# Altium PCB 加密狗第五版.PcbDoc
Units mm, origin at the board's own origin, x right, y up, seen from the top; angles counter-clockwise.
Board outline 16.51 x 19.43 mm, 2 copper layers (Top Layer, Bottom Layer); 20 components, 24 nets, 83 pads, 18 vias.
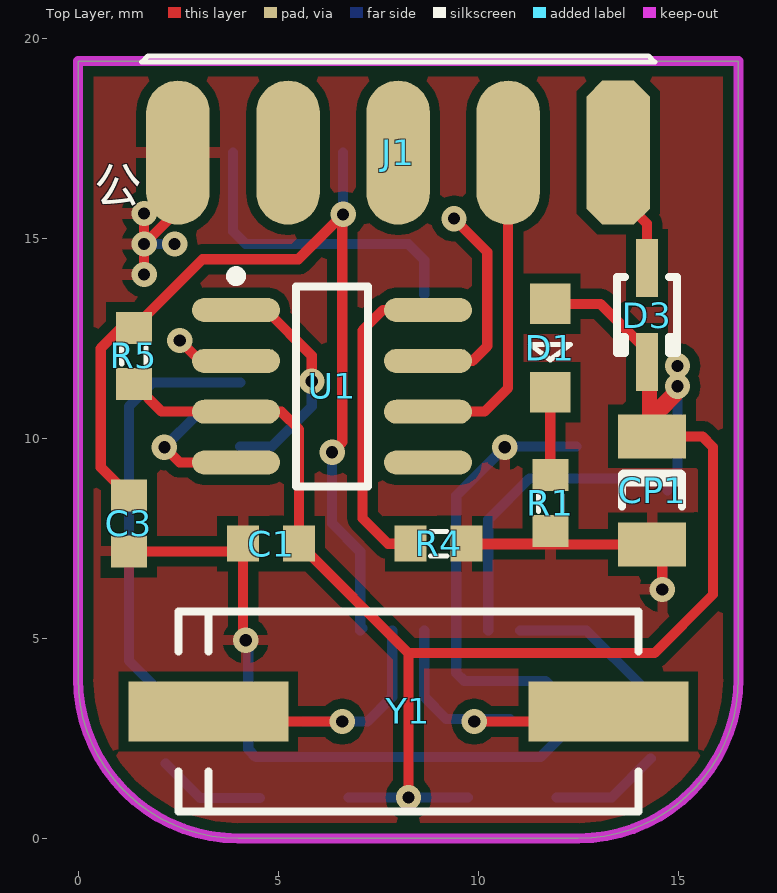
[diagram p0: Top Layer view]
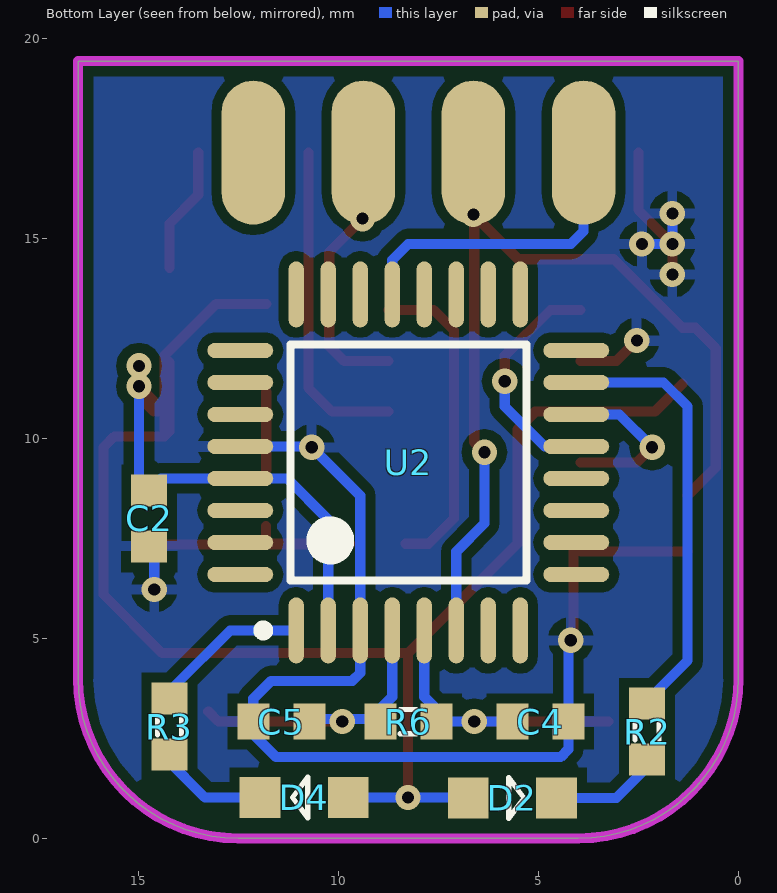
[diagram p1: Bottom Layer view, seen from below]

## Layer stack, top to bottom
Top Layer: signal copper 0.0356
Dielectric: dielectric 0.32, FR-4, Dk 4.8
Bottom Layer: signal copper 0.0356

## Board outline
0,4 ccw(c4,4) 4,0 12.51,0 ccw(c12.51,4) 16.51,4 16.51,19.431 0,19.431

## Design rules (kind name [scope] priority, off if disabled: settings)
Clearance [All] p1: gap=0.254
PolygonConnect [All] p1: connectstyle=Relief reliefconductorwidth=0.254 reliefentries=4 polygonreliefangle="90 Angle"
RoutingVias [All] p1: holewidth=0.305 width=0.635 viastyle="Through Hole" minholewidth=0.305 minwidth=0.635 maxholewidth=0.305 maxwidth=0.635
SilkscreenOverComponentPads [All] p1: minsilkscreentomaskgap=0.254
SolderMaskExpansion [All] p1: expansion=0.102
Width [All] p1: maxlimit=0.254 minlimit=0.254 preferedwidth=0.254
27 further rules are at their usual default settings.

## Components (designator, comment, footprint, x,y, rotation, side; value= is the part's Value field where it differs from the comment)
C1 "0.1uF" 1608[0603] 4.826,7.366 r180 top
C2 "0.1uF" 1608[0603] 14.732,8.001 r270 bottom
C3 "0.1uF" 1608[0603] 1.27,7.874 r270 top
C4 "22pF" 1608[0603] 4.953,2.921 r180 bottom
C5 "22pF" 1608[0603] 11.43,2.921 r0 bottom
CP1 "10uF/10V" C1206 14.351,8.701 r270 top
D1 "Green" LED 11.811,13.335 r270 top
D2 "Red" LED 6.731,1.016 r180 bottom
D3 "BAT760" SOD323 14.224,13.081 r270 top
D4 "黄" LED 9.779,1.016 r0 bottom
J1 "DB9" DB9Male 8.001,17.145 r0 top
R1 "Res2" "1608[0603] -R" 11.811,8.382 r90 top
R2 "Res2" "1608[0603] -R" 2.286,2.667 r270 bottom
R3 "Res2" "1608[0603] -R" 14.224,2.794 r270 bottom
R4 "Res2" "1608[0603] -R" 9.017,7.366 r180 top
R5 "Res2" "1608[0603] -R" 1.397,12.065 r270 top
R6 "Res2" "1608[0603] -R" 8.255,2.921 r180 bottom
U1 "MCP2551-E/SN" SOIC-SN8_N 6.35,11.303 r0 top
U2 "MC9S08DZ16" LQFP-32_N 8.255,9.398 r90 bottom
Y1 "XTAL" BCY-F2/Z13 8.255,3.175 r0 top

## Footprints (in the part's own frame and the unit in brackets; to place one, negate y for a bottom-side part, rotate by r counter-clockwise, add the part's x,y. Pads: shape width x height; smd on the part's side, far side on the other; paste and mask are expansions set on the pad)
1608[0603] [mm]
  rect 0.8x0.9 smd: 1(-0.7,0) 2(0.7,0)
  body extent -0.87,-0.48 0.87,0.48, height 1.3
"1608[0603] -R" [mm]
  rect 0.8x0.9 smd: 1(-0.7,0) 2(0.7,0)
  silkscreen extent -0.2,-0.3 0.2,0.3, body extent -0.87,-0.48 0.87,0.48, height 1.3
BCY-F2/Z13 [mm] "Quartz Crystal,"
  rect 4x1.5 smd: 1(-5,0) 2(5,0)
  silkscreen extent -5.75,-2.5 5.75,2.5
C1206 [mm]
  rect 1.1x1.7 smd: 1(-1.35,0) 2(1.35,0)
  silkscreen extent -0.4,-0.75 0.4,0.75, body extent -1.7,-0.9 1.7,0.9, height 1.3
DB9Male [mil]
  oct 62.5x141.67 smd: 1(216.67,0)
  oval 62.5x141.67 smd: 2(108.33,0) 3(0,0) 4(-108.33,0) 5(-216.67,0)
  oval 62.5x141.67 smd far side: 6(162.5,0) 7(54.17,0) 8(-54.17,0) 9(-162.5,0)
  silkscreen extent -252,89 253,95
LED [mil]
  rect 40x40 smd: 1(-1.06,-0.22) 2(85.95,-0.22)
  silkscreen extent 39,-20 54,20
LQFP-32_N [mm] "Thi"
  oval 1.65x0.381 smd: 1(-4.2,2.8) 2(-4.2,2) 3(-4.2,1.2) 4(-4.2,0.4) 5(-4.2,-0.4) 6(-4.2,-1.2) 7(-4.2,-2) 8(-4.2,-2.8) 17(4.2,-2.8) 18(4.2,-2) 19(4.2,-1.2) 20(4.2,-0.4) 21(4.2,0.4) 22(4.2,1.2) 23(4.2,2) 24(4.2,2.8)
  oval 0.381x1.65 smd: 9(-2.8,-4.2) 10(-2,-4.2) 11(-1.2,-4.2) 12(-0.4,-4.2) 13(0.4,-4.2) 14(1.2,-4.2) 15(2,-4.2) 16(2.8,-4.2) 25(2.8,4.2) 26(2,4.2) 27(1.2,4.2) 28(0.4,4.2) 29(-0.4,4.2) 30(-1.2,4.2) 31(-2,4.2) 32(-2.8,4.2)
  silkscreen extent -4.32,-2.95 2.95,3.75, body extent -3.5,-3.5 3.5,3.5, height 1.6
SOD323 [mm] "SOD-323/SC-76; 2 Leads; Body 1.7 x 1.3 mm,"
  rect 1.45x0.55 smd: 1(1.175,0) 2(-1.175,0)
  silkscreen extent -0.95,-0.75 0.95,0.75
SOIC-SN8_N [mm]
  oval 2.2x0.6 smd: 1(-2.4,1.905) 2(-2.4,0.635) 3(-2.4,-0.635) 4(-2.4,-1.905) 5(2.4,-1.905) 6(2.4,-0.635) 7(2.4,0.635) 8(2.4,1.905)
  silkscreen extent -2.52,-2.5 0.9,2.88, body extent -2,-2.5 2,2.5, height 1.75

## Part data
C1 C2 C3 C4 C5: library part CAP, "C"
CP1: library part CAPACITOR, "C"
D1 D2 D4: library part LED2, "Typical RED, GREEN, YELLOW, AMBER"
D3: "Schottky Barrier Diode"
U1: "High-Speed CAN Transceiver, 8-Pin SOIC, Extended Tem"
U2: library part MC9S08DZ60
Y1: "Crystal Oscillator"

## Via types
v1: diameter 0.635, hole 0.305, Top Layer to Bottom Layer, tented both sides, 18 vias

## Nets (pads, with @x,y where several pads share a name; then routed paths per layer and width w, separated by ;. In a path a pad name is that pad's centre, name@x,y a point inside that pad or via, vN(x,y) a via of type N, cw(c..) or ccw(c..) an arc to the next point about the centre after c; other vN are vias at no path point)
BKGD: J1.9 U2.21 | length 7.9
  Bottom Layer w0.254: J1.9 3.873,15.176 4.191,14.859 8.255,14.859 8.655,14.459 U2.21
CANH: J1.7 U1.7 | length 5.2
  Top Layer w0.254: U1.7 9.864,11.938 10.231,12.305 10.231,14.661 v1(9.398,15.494)
CANL: J1.2 U1.6 | length 8.1
  Top Layer w0.254: U1.6 10.16,10.668 10.753,11.261 J1.2
EXTAL: C5.1 R6.1 U2.4 Y1.2 | length 7.5
  Top Layer w0.254: v1(9.906,2.921) 13.001,2.921 Y1.2
  Bottom Layer w0.254: U2.4 8.655,3.537 9.206,2.986 C5.1@10.795,2.986
GND: C1.2 C2.2 C3.2 C4.2 C5.2 CP1.2 J1.5 R1.1 R4.1 U1.2 U2.3 U2.28 | length 44.9
  Top Layer w0.254: C3.2 3.934,7.174 C1.2 4.126,5.018 v1(4.191,4.953) ; v1(1.651,14.097) v1(1.651,14.859) ; v1(1.651,15.621) v1(1.651,14.859) ; J1.5 2.498,15.706 v1(1.651,14.859) ; v1(2.54,12.446) 3.048,11.938 U1.2 ; R1.1@11.811,7.809 R1.1 11.811,7.366 R4.1 9.732,7.351 CP1.2 14.605,7.097 v1(14.605,6.223)
  Bottom Layer w0.254: v1(1.651,14.097) v1@1.778,14.224 ; v1(1.651,15.621) v1(1.651,14.859) v1(2.413,14.859) ; v1(4.191,4.953) 4.253,4.891 C4.2 4.253,2.224 4.445,2.032 11.557,2.032 12.13,2.605 C5.2 12.13,3.491 11.684,3.937 9.652,3.937 9.455,4.134 U2.3 9.455,8.566 v1(10.668,9.779) 10.687,9.798 U2.28 ; v1(14.605,6.223) C2.2@14.605,7.174
IRQ: R3.1 U2.1 | length 4.1
  Bottom Layer w0.254: U2.1 12.709,5.198 14.097,3.81 R3.1@14.097,3.367
NetD1_2: D1.2 R1.2 | length 2
  Top Layer w0.254: R1.2@11.811,9.209 11.806,9.215 D1.2 D1.2@11.811,11.146
NetD2_2: D2.2 R2.2 | length 2.7
  Bottom Layer w0.254: R2.2@2.192,1.872 3.053,1.011 D2.2
NetD4_2: D4.2 R3.2 | length 2.8
  Bottom Layer w0.254: D4.2 13.34,1.021 R3.2@14.318,1.999
NetR4_2: R4.2 U1.8 | length 8
  Top Layer w0.254: R4.2 7.747,7.366 7.112,8.001 7.112,12.7 7.62,13.208 U1.8
PTD0: R2.1 U2.15 | length 10.9
  Bottom Layer w0.254: R2.1@2.317,3.398 1.27,4.445 1.27,10.795 1.873,11.398 U2.15
PTD2: U2.17
RESET: C3.1 J1.8 R5.1 U2.6 | length 23.8
  Top Layer w0.254: C3.1 0.566,9.278 0.566,12.25 1.081,12.765 R5.1 3.11,14.478 5.503,14.478 v1@6.604,15.579 ; v1(6.35,9.652) 6.604,9.906 v1@6.604,15.579 ; v1(6.625,15.6) v1@6.604,15.579
  Bottom Layer w0.254: v1(6.35,9.652) 6.35,7.874 7.055,7.169 U2.6 U2.6@7.112,5.255 ; v1(6.625,15.6) J1.8
RXCAN: U1.4 U2.14 | length 4.2
  Top Layer w0.254: v1(2.159,9.779) 2.54,9.398 U1.4
  Bottom Layer w0.254: v1(2.159,9.779) 2.978,10.598 U2.14
RXD0: U2.8
S\S\: U2.9
SCL/MOSI: U2.11
SDA/MISO: U2.12
SPSCK: U2.10
TXCAN: U1.1 U2.13 | length 5.9
  Top Layer w0.254: U1.1 4.699,13.208 5.842,12.065 v1(5.842,11.43)
  Bottom Layer w0.254: U2.13@4.074,9.779 U2.13 4.845,9.798 5.842,10.795 v1(5.842,11.43)
TXD0: U2.7
VCC: D3.2 J1.1 | length 3.2
  Top Layer w0.254: J1.1 13.504,16.087 14.224,15.367 D3.2
VDD5V: C1.1 C2.1 CP1.1 D1.1 D2.1 D3.1 D4.1 R5.2 U1.3 U2.2 U2.29 | length 51.5
  Top Layer w0.254: R5.2 2.094,10.668 U1.3 5.08,10.668 5.526,10.222 C1.1 8.26,4.632 ; v1(8.26,1.021) 8.26,4.632 ; D1.1 13.054,13.362 14.351,12.065 14.351,10.668 ; D3.1 14.224,10.178 CP1.1 ; v1(14.986,11.811) v1(14.986,11.303) ; 8.26,4.632 14.411,4.632 15.875,6.096 15.875,9.779 15.603,10.051 CP1.1 ; CP1.1 14.351,10.668 ; 14.351,10.668 14.605,10.668 14.986,11.049 v1(14.986,11.303) ; 14.351,10.668 v1(14.986,11.303)
  Bottom Layer w0.254: D2.1@6.769,1.021 v1(8.26,1.021) D4.1 ; U2.2 10.255,7.969 11.284,8.998 U2.29 C2.1@14.435,8.998 ; C2.1 14.986,8.955 v1(14.986,11.303) v1(14.986,11.811)
XTAL: C4.1 R6.2 U2.5 Y1.1 | length 7.5
  Top Layer w0.254: Y1.1@3.255,2.921 v1(6.604,2.921)
  Bottom Layer w0.254: C4.1 v1(6.604,2.921) 7.239,2.921 7.855,3.537 U2.5
pads on no net: J1.3 J1.4 J1.6 U1.5 U2.16 U2.18 U2.19 U2.20 U2.22 U2.23 U2.24 U2.25 U2.26 U2.27 U2.30 U2.31 U2.32

## Polygon pours and split planes (outlines as drawn)
GND on Top Layer "Top Layer-No Net" (solid, pour order 2): 0,19.431 0,0.254 0.254,0 16.51,0 16.51,19.431 0,19.431
GND on Bottom Layer "Top Layer-No Net" (solid, pour order 2): 0,19.431 0,0.254 0.254,0 16.51,0 16.51,19.431 0,19.431

## Keep-outs
Keep-Out Layer:
  the board outline again, w0.254

## Silkscreen, mask and mechanical layers (free items; w line width, h text height)
Top Solder:
  text "JM.V5" at 15.24,18.796 h0.8 r270
Drill Drawing:
  text ".Legend" at 19.431,0.762 h0.8

## Text inside footprints (layer, text, board x,y; h text height)
J1: Top Overlay "公" at 0.381,15.621 h1.52